# Altium PCB Routed Copy of PetTrackerPCB.PcbDoc
Units mm, origin at the board's own origin, x right, y up, seen from the top; angles counter-clockwise.
Board outline 116.71 x 58.42 mm, 4 copper layers (Top Layer, GND Plane, PWR Plane, Bottom Layer), stack 0.868 mm thick; 37 components, 44 nets, 216 pads, 87 vias.
Unrouted connection lines stored in the file: 60.
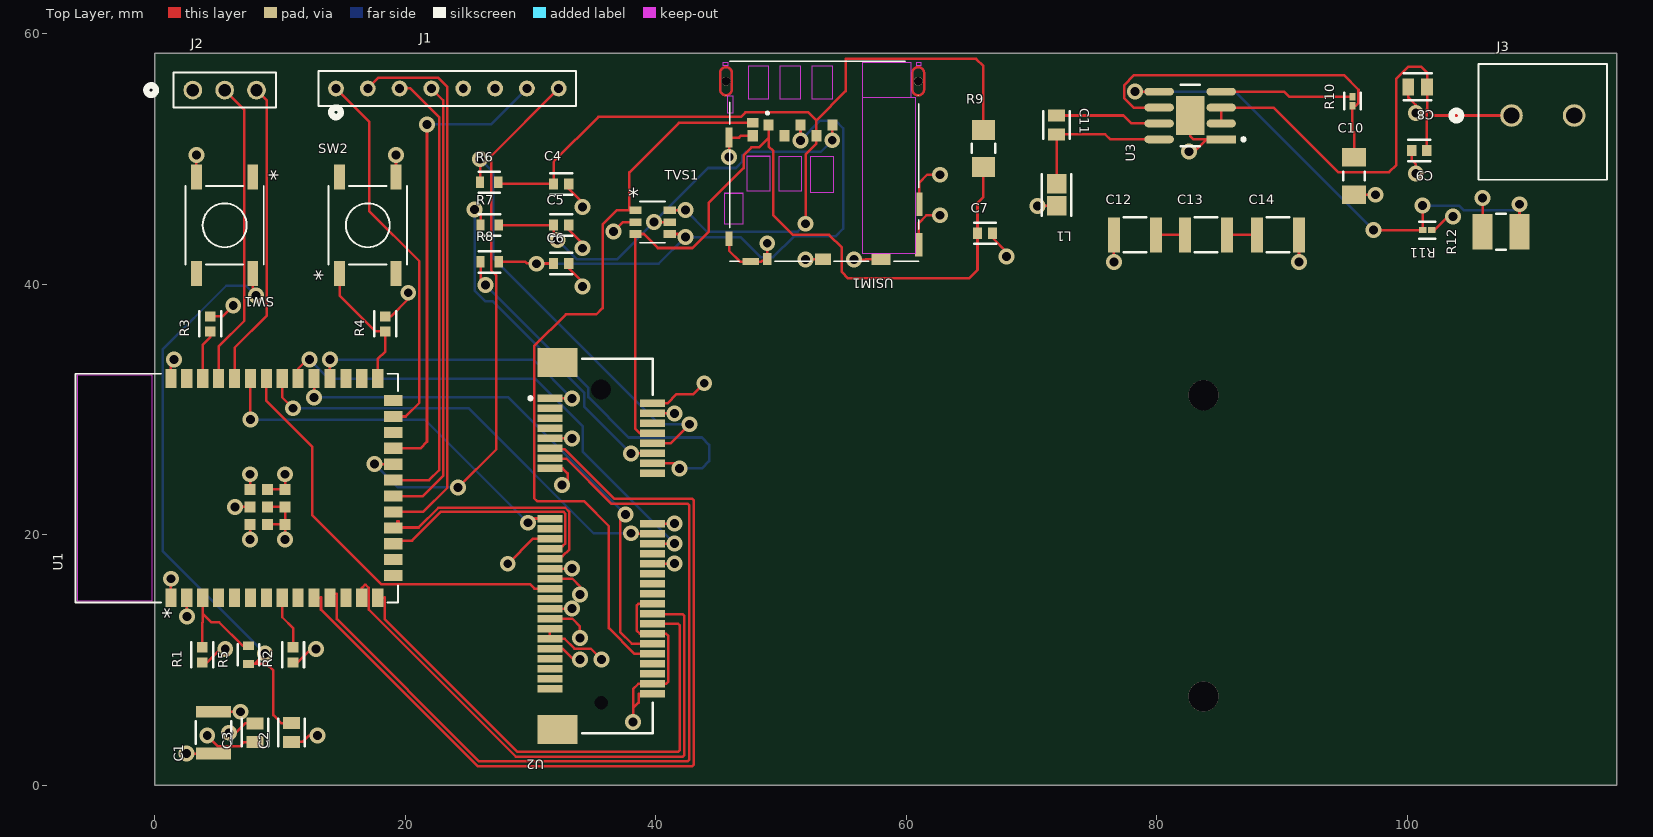
[diagram p0: Top Layer view]
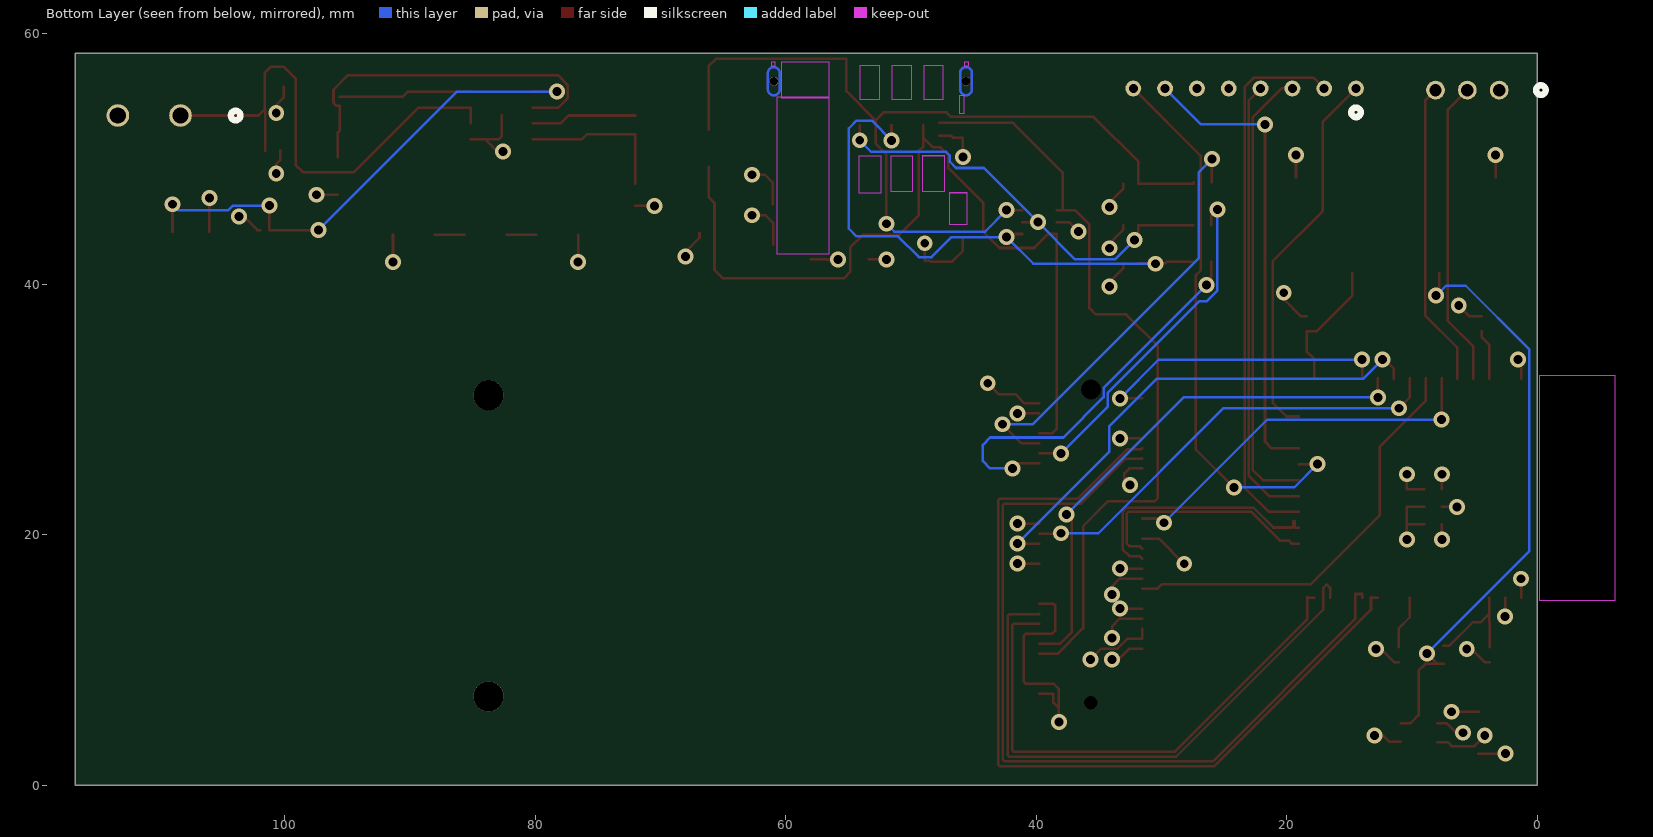
[diagram p1: Bottom Layer view, seen from below]
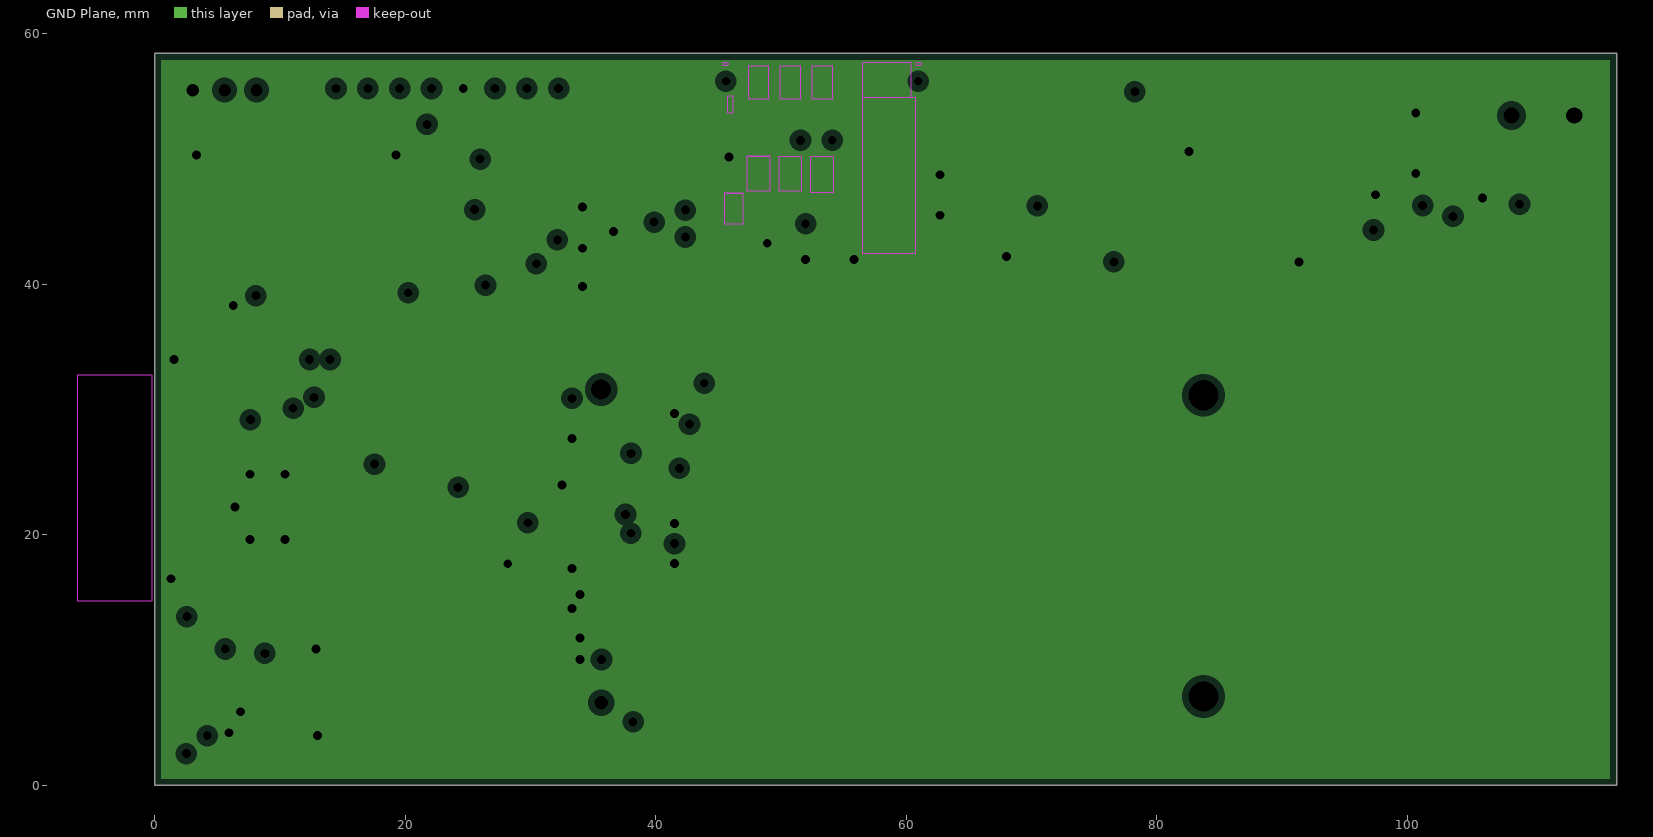
[diagram p2: GND Plane, clearances drawn from the general rule]
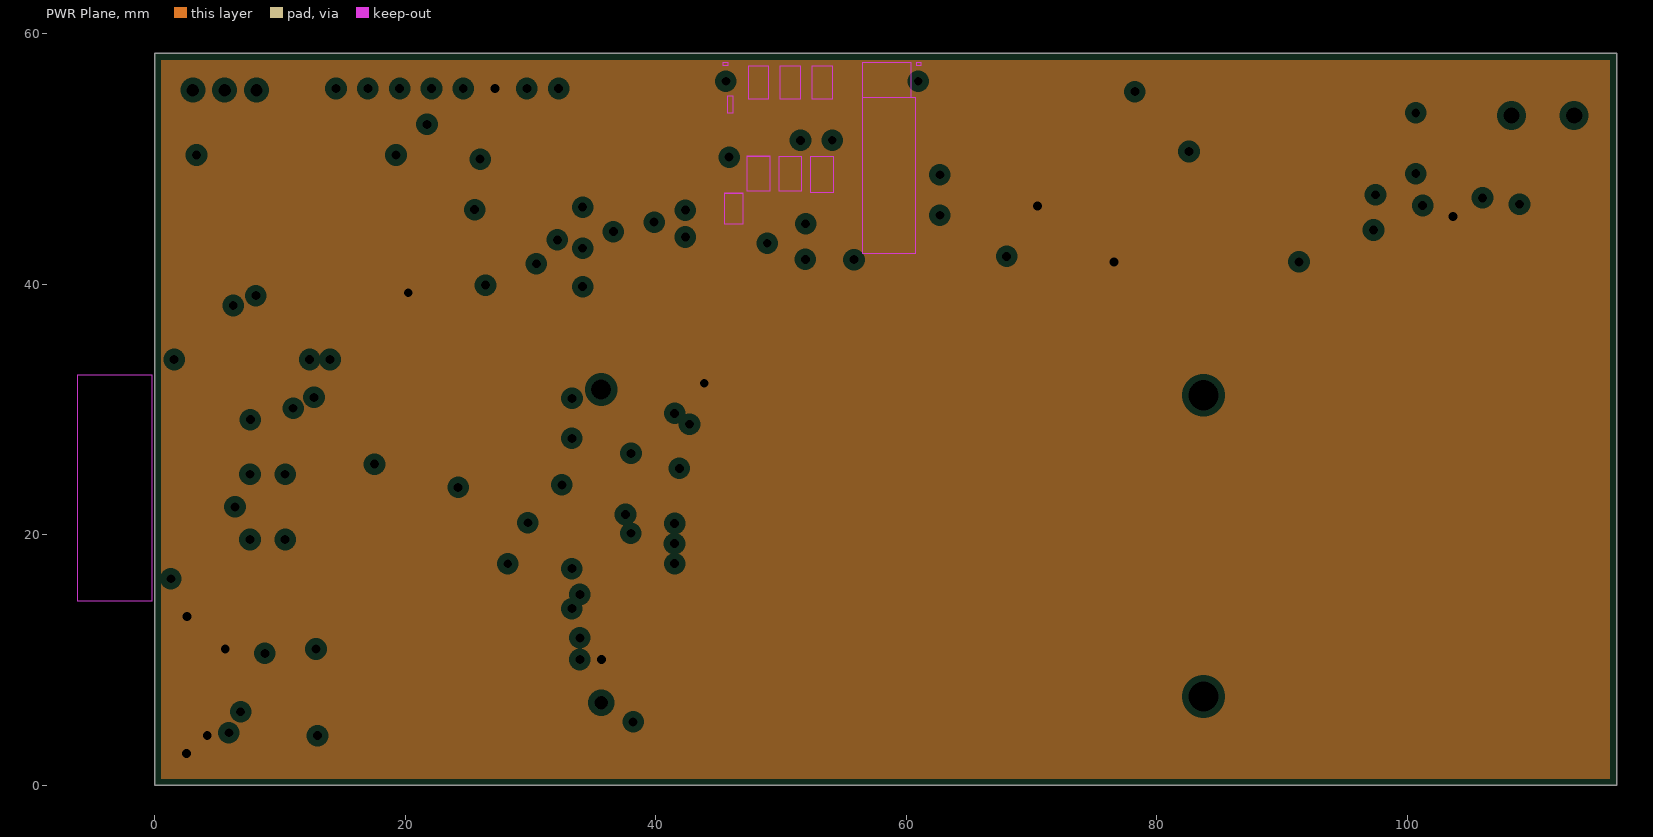
[diagram p3: PWR Plane, clearances drawn from the general rule]
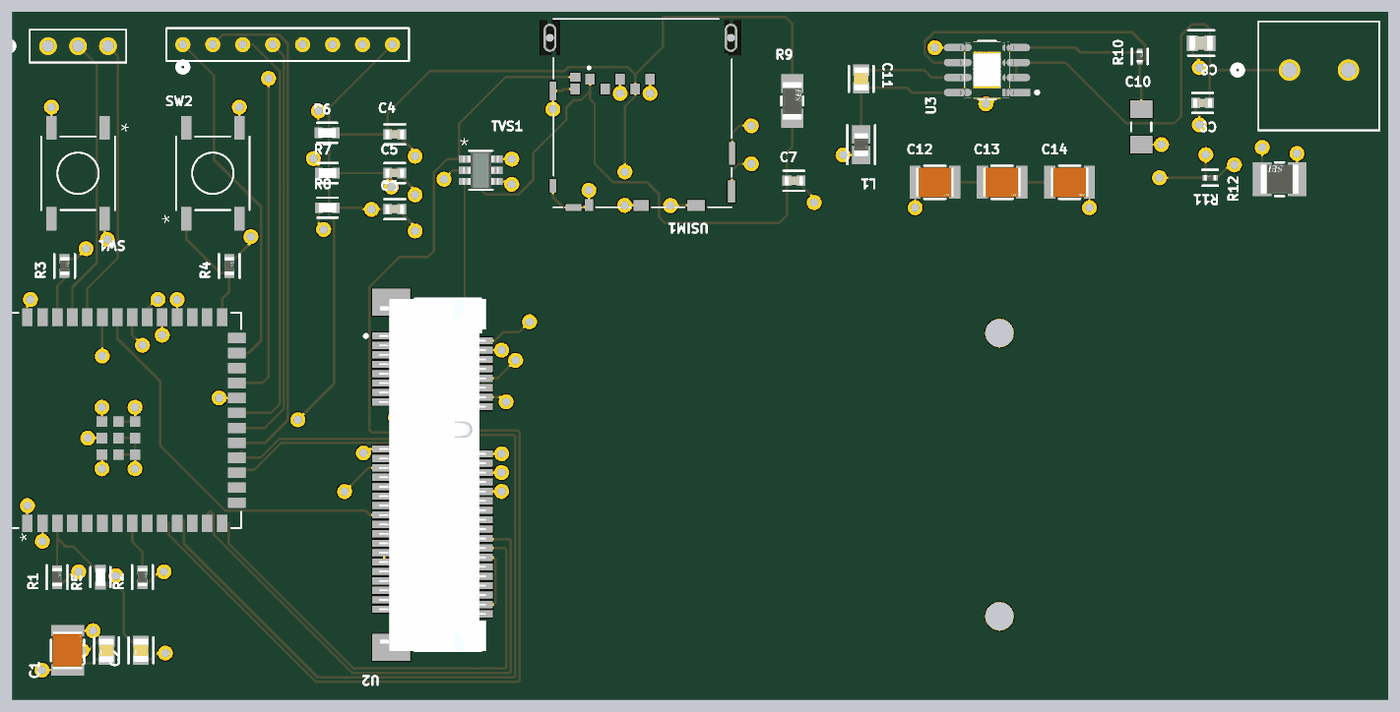
[diagram p4: 3D render of the assembled board from above, using the file's embedded part models]

## Layer stack, top to bottom
Top Solder: solder mask 0.0102, Solder Resist, Dk 3.5
Top Layer: signal copper 0.0356
Dielectric 4: core 0.1016, Core-009, Dk 4.5
Dielectric 2: core 0.1016, Core-009, Dk 4.5
GND Plane: plane copper 0.035, net GND
Dielectric 1: dielectric 0.32, FR-4, Dk 4.8
PWR Plane: plane copper 0.035, net +3V3
Dielectric 3: core 0.1016, Core-009, Dk 4.5
Dielectric 5: core 0.1016, Core-009, Dk 4.5
Bottom Layer: signal copper 0.0356
Bottom Solder: solder mask 0.0102, Solder Resist, Dk 3.5

## Board outline
0,0 116.713,0 116.713,58.42 0,58.42

## Design rules (kind name [scope] priority, off if disabled: settings)
Clearance [All] p1: gap=0.127 ignorepadtopadclearanceinfootprint=FALSE
Height [All] p1 off: minheight=0 maxheight=25.4 prefheight=12.7
PlaneClearance [All] p1: clearance=0.508
PlaneConnect [All] p1: planeconnectstyle=Relief reliefexpansion=0.508 reliefentries=4 reliefconductorwidth=0.254 reliefairgap=0.254
PolygonConnect [All] p1: connectstyle=Relief reliefconductorwidth=0.254 reliefentries=4 polygonreliefangle="90 Angle" airgapwidth=0.254
RoutingVias [All] p1: holewidth=0.711 width=1.27 viastyle="Through Hole" minholewidth=0.711 minwidth=1.27 maxholewidth=0.711 maxwidth=1.27
SolderMaskExpansion [All] p1: expansion=0.102 istentingtop=FALSE
Width [All] p1: maxlimit=25.4 minlimit=0.127 preferedwidth=0.203
27 further rules are at their usual default settings.

## Classes and differential pairs
component class PowerSupply: C8 C9 C10 C11 C12 C13 C14 CBOOT CHF CIN Cout CVCC J3 L L1 R10 R11 R12 RFBB RFBT U3
component class EC25: C4 C5 C6 C7 CRF1 CRF2 CRF3 CRF4 R6 R7 R8 R9 RDB1 RDB2 RDB3 RS1 TVS1 "TVS Array" U2 USIM1 "USIM Connector"
component class Dataflow: C1 C2 C3 "Camera Interface" J1 J2 R1 R2 R3 R4 R5 RDB RPU1 S2 SW1 SW2 U1 "USB Connector"

## Components (designator, comment, footprint, x,y, rotation, side; value= is the part's Value field where it differs from the comment)
C1 "C3225X7R1C226M250AC" FP-C3225-250-0_4-IPC_B 4.699,4.191 r90 top
C2 "C0805C104M5UACTU" FP-C0805C104M5UACTU-MFG 10.922,4.203 r90 top
C3 "C0805C104M5UACTU" FP-C0805C104M5UACTU-MFG 8.001,4.191 r90 top
C4 "C0603C104J5RACTU" FP-C0603C-CF-MFG 32.447,48.006 r0 top value="0.10 μF"
C5 "C0603C104J5RACTU" FP-C0603C-CF-MFG 32.447,44.72 r0 top value="0.10 μF"
C6 "C0603C104J5RACTU" FP-C0603C-CF-MFG 32.447,41.656 r0 top value="0.10 μF"
C7 "C0603C104J5RACTU" FP-C0603C-CF-MFG 66.294,44.069 r0 top value="0.10 μF"
C8 "C0805C106K8PACTU" FP-C0805C-DG-MFG 100.838,55.753 r180 top value=10uF
C9 "C0603C224K3RACTU" FP-C0603C-CF-MFG 100.965,50.673 r180 top value="0.22 μF"
C10 "C1206C105K3RACTU" CAPC3216X180X50ML20T25 95.758,48.641 r90 top
C11 "C0805C104M5UACTU" FP-C0805C104M5UACTU-MFG 72.009,52.717 r270 top
C12 "C3225X7R1C226M250AC" FP-C3225-250-0_4-IPC_B 78.256,43.942 r0 top
C13 "C3225X7R1C226M250AC" FP-C3225-250-0_4-IPC_B 83.947,43.942 r0 top
C14 "C3225X7R1C226M250AC" FP-C3225-250-0_4-IPC_B 89.686,43.942 r0 top
J1 "TS-108-T-A" CON8_1X8_TU_HTS_SAI 23.368,55.626 r0 top
J2 "PREC003SAAN-RC" CONN_PREC003SAAN-RC_SUL 3.048,55.499 r0 top
J3 "1935161" CONN_1935161_PXC 108.331,53.467 r0 top value=10uF
L1 "MLZ2012N6R8LT000" FP-MLZ2012-0_85-IPC_A 72.009,47.13 r270 top
R1 "RMCF0603JT10K0" FP-RMCF0603-IPC_C 3.81,10.414 r90 top
R2 "RMCF0603JT10K0" FP-RMCF0603-IPC_C 11.049,10.414 r90 top
R3 "RMCF0603JT10K0" FP-RMCF0603-IPC_C 4.445,36.83 r90 top
R4 "RMCF0603JT10K0" FP-RMCF0603-IPC_C 18.415,36.83 r90 top
R5 "RMCF0603ZT0R00" FP-RMCF0603-MFG 7.493,10.414 r90 top value=0mΩ
R6 "RMCF0603ZT0R00" FP-RMCF0603-MFG 26.707,48.133 r0 top value=0mΩ
R7 "RMCF0603ZT0R00" FP-RMCF0603-MFG 26.744,44.718 r0 top value=0mΩ
R8 "RMCF0603ZT0R00" FP-RMCF0603-MFG 26.744,41.783 r0 top value=0mΩ
R9 "RMCF1206JT15K0" FP-RMCF1206-IPC_A 66.167,50.848 r90 top
R10 "RMCF0402FT100K" FP-RMCF0402-IPC_C 95.631,54.61 r90 top
R11 "RMCF0402FT100K" FP-RMCF0402-IPC_C 101.6,44.323 r180 top
R12 "RMCF1210JT3K30" FP-RMCF1210-IPC_A 107.49,44.196 r180 top
SW1 "PTS645SL43SMTR92LFS" PTS645SL43SMTR92LFS_CNK 5.588,44.704 r270 top
SW2 "PTS645SL43SMTR92LFS" PTS645SL43SMTR92LFS_CNK 17.018,44.704 r90 top
TVS1 "AQRV05-4HTG" SOT23-6_LTF 39.751,44.958 r0 top
U1 "ESP32-S2-SOLO-N4R2" MOD41_ESP32-S2-SOLO_EXP 6.557,23.722 r90 top
U2 "2041119-1" TECO-2041119-1_3_V 35.651,19.092 r270 top
U3 "LMR33640ADDAR" FP-DDA0008J-IPC_A 82.677,53.467 r180 top
USIM1 "2174803-2" CONN_2174803-2 50.927,51.405 r180 top

## Footprints (in the part's own frame and the unit in brackets; to place one, negate y for a bottom-side part, rotate by r counter-clockwise, add the part's x,y. Pads: shape width x height; smd on the part's side, far side on the other; paste and mask are expansions set on the pad)
CAPC3216X180X50ML20T25 [mm] "Chip Capacitor, 2-Leads, Body 3.40x1.80mm, IPC Low Density"
  rect 1.5x1.9 smd: 1(-1.5,0) 2(1.5,0)
  silkscreen extent -0.35,-0.85 0.35,0.85, body extent -1.7,-0.9 1.7,0.9, height 1.8
CON8_1X8_TU_HTS_SAI [mil]
  round 50 / inner round 60 / far side round 50 hole 28 paste-99999 mask+0: 1(-350,0) 2(-250,0) 3(-150,0) 4(-50,0) 5(50,0) 6(150,0) 7(250,0) 8(350,0)
  silkscreen extent -405,-90 405,55
CONN_1935161_PXC [mil]
  round 71 / inner round 60 / far side round 71 hole 51 paste-99999 mask+0: 1(0,0) 2(196.85,0)
  silkscreen extent -188,-202 300,162
CONN_2174803-2 [mm]
  rect 0.8x0.9 smd: C1(1.905,-1.3) C2(-0.635,-1.3) C3(-3.175,-1.3) C5(3.175,-0.45) C6(0.635,-0.45) C7(-1.905,-0.45)
  rect 0.1x0.1 smd paste-1 mask+0: C8(5.315,-3.657) C17(-10.035,-3.657)
  rect 0.54x1.6 smd: C9(5.065,-0.3)
  rect 0.54x1.17 smd: C10(5.065,7.785)
  rect 1.33x0.55 smd: C11(3.33,9.605)
  rect 0.7x0.98 smd: C12(2.015,9.39)
  rect 1.3x0.91 smd: C13(-2.435,9.425)
  rect 1.53x0.91 smd: C14(-7.07,9.425)
  rect 0.6x1.9 smd: C15(-10.085,8.25)
  rect 0.5x1.9 smd: C16(-10.135,5.02)
  rect 0.9x0.75 smd: SW(3.175,-1.475)
  round 0.7 hole 0.7 unplated: ""(-10.035,-4.8) ""(5.315,-4.8)
  Top Layer region: 126 vertices and 1 holes, not listed, extent 4.765,-6 5.865,-3.6
  Top Layer region: 124 vertices and 1 holes, not listed, extent -10.585,-6 -9.485,-3.6
  Bottom Layer region: 126 vertices and 1 holes, not listed, extent 4.765,-6 5.865,-3.6
  Bottom Layer region: 124 vertices and 1 holes, not listed, extent -10.585,-6 -9.485,-3.6
  Keep-Out Layer region: -5.624,-3.502 -9.806,-3.502 -9.806,8.97 -5.624,8.97
  Keep-Out Layer region: -5.624,-6.326 -9.458,-6.326 -9.458,-3.5 -5.624,-3.5
  Keep-Out Layer region: -1.565,-6.021 -3.155,-6.021 -3.155,-3.35 -1.565,-3.35
  Keep-Out Layer region: 0.975,-6.024 -0.615,-6.024 -0.615,-3.35 0.975,-3.35
  Keep-Out Layer region: 3.515,-6.031 1.928,-6.031 1.928,-3.35 3.515,-3.35
  Keep-Out Layer region: 5.515,-6.332 5.175,-6.332 5.175,-6.02 5.515,-6.02
  Keep-Out Layer region: 5.165,-3.65 4.765,-3.65 4.765,-2.25 5.165,-2.25
  Keep-Out Layer region: -1.465,1.172 -3.261,1.172 -3.261,4.12 -1.465,4.12
  Keep-Out Layer region: 1.075,1.171 -0.716,1.171 -0.716,4 1.075,4
  Keep-Out Layer region: 3.615,1.172 1.828,1.172 1.828,4 3.615,4
  Keep-Out Layer region: 5.42,4.127 3.977,4.127 3.977,6.63 5.42,6.63
  Keep-Out Layer region: -9.9,-6.323 -10.24,-6.323 -10.24,-6.02 -9.9,-6.02
  Keep-Out Layer region: -5.624,-3.505 -9.815,-3.505 -9.815,8.97 -5.624,8.97
  Keep-Out Layer region: -5.624,-6.322 -9.452,-6.322 -9.452,-3.5 -5.624,-3.5
  Keep-Out Layer region: -1.565,-6.027 -3.159,-6.027 -3.159,-3.35 -1.565,-3.35
  Keep-Out Layer region: 0.975,-6.023 -0.615,-6.023 -0.615,-3.35 0.975,-3.35
  Keep-Out Layer region: 3.515,-6.021 1.925,-6.021 1.925,-3.35 3.515,-3.35
  Keep-Out Layer region: 5.515,-6.326 5.17,-6.326 5.17,-6.02 5.515,-6.02
  Keep-Out Layer region: 5.165,-3.653 4.768,-3.653 4.768,-2.25 5.165,-2.25
  Keep-Out Layer region: -1.465,1.172 -3.261,1.172 -3.261,4.12 -1.465,4.12
  Keep-Out Layer region: 1.075,1.171 -0.716,1.171 -0.716,4 1.075,4
  Keep-Out Layer region: 3.615,1.171 1.826,1.171 1.826,4 3.615,4
  Keep-Out Layer region: 5.42,4.123 3.973,4.123 3.973,6.63 5.42,6.63
  Keep-Out Layer region: -9.9,-6.332 -10.255,-6.332 -10.255,-6.02 -9.9,-6.02
  Keep-Out Layer region: -5.624,-3.506 -9.818,-3.506 -9.818,8.97 -5.624,8.97
  Keep-Out Layer region: -5.624,-6.322 -9.454,-6.322 -9.454,-3.5 -5.624,-3.5
  Keep-Out Layer region: -1.565,-6.024 -3.157,-6.024 -3.157,-3.35 -1.565,-3.35
  Keep-Out Layer region: 0.975,-6.03 -0.616,-6.03 -0.616,-3.35 0.975,-3.35
  Keep-Out Layer region: 3.515,-6.028 1.927,-6.028 1.927,-3.35 3.515,-3.35
  Keep-Out Layer region: 5.515,-6.332 5.175,-6.332 5.175,-6.02 5.515,-6.02
  Keep-Out Layer region: 5.165,-3.653 4.769,-3.653 4.769,-2.25 5.165,-2.25
  Keep-Out Layer region: -1.465,1.172 -3.261,1.172 -3.261,4.12 -1.465,4.12
  Keep-Out Layer region: 1.075,1.171 -0.715,1.171 -0.715,4 1.075,4
  Keep-Out Layer region: 3.615,1.17 1.825,1.17 1.825,4 3.615,4
  Keep-Out Layer region: 5.42,4.121 3.971,4.121 3.971,6.63 5.42,6.63
  Keep-Out Layer region: -9.9,-6.332 -10.255,-6.332 -10.255,-6.02 -9.9,-6.02
  silkscreen extent -10.09,-6.4 5.01,9.58
CONN_PREC003SAAN-RC_SUL [mil]
  round 59 / inner round 60 / far side round 59 hole 39 paste-99999 mask+0: 1(0,0) 2(100,0) 3(200,0)
  silkscreen extent -146,-55 261,55
FP-C0603C-CF-MFG [mm]
  rect 0.75x0.9 smd paste+0 mask+0: 1(-0.6,0) 2(0.6,0)
  silkscreen extent -0.88,-0.85 0.88,0.85, body extent -1.2,-0.6 1.2,0.6, height 0.25
FP-C0805C104M5UACTU-MFG [mm]
  rect 0.95x1.35 smd paste+0 mask+0: 1(-0.75,0) 2(0.75,0)
  silkscreen extent -1.1,-1.05 1.1,1.05, body extent -1.4,-0.85 1.4,0.85, height 0.25
FP-C0805C-DG-MFG [mm]
  rect 0.95x1.35 smd paste+0 mask+0: 1(-0.75,0) 2(0.75,0)
  silkscreen extent -1.11,-1.08 1.1,1.07, body extent -1.4,-0.85 1.4,0.85, height 0.25
FP-C3225-250-0_4-IPC_B [mm]
  rect 0.953x2.804 smd paste+0 mask+0: 1(-1.675,0) 2(1.675,0)
  silkscreen extent -0.9,-1.4 0.9,1.4, body extent -2.4,-1.65 2.4,1.65, height 0.25
FP-DDA0008J-IPC_A [mm]
  rect 2.353x0.622 smd paste+0 mask+0: 1(-2.477,1.905)
  rrect100% 2.353x0.622 smd paste+0 mask+0: 2(-2.477,0.635) 3(-2.477,-0.635) 4(-2.477,-1.905) 5(2.477,-1.905) 6(2.477,-0.635) 7(2.477,0.635) 8(2.477,1.905)
  rect 2.3x3.1 smd paste-1000 mask+0: 9(0,0)
  silkscreen extent -4.38,-2.45 0.75,2.45, body extent -4.15,-2.95 4.15,2.95, height 0.25
FP-MLZ2012-0_85-IPC_A [mm]
  rect 1.554x1.556 smd paste+0 mask+0: 1(-0.876,0) 2(0.876,0)
  silkscreen extent -1.65,-1.18 1.65,1.18, body extent -2.15,-1.28 2.15,1.28, height 0.25
FP-RMCF0402-IPC_C [mm]
  rect 0.581x0.472 smd paste+0 mask+0: 1(-0.366,0) 2(0.366,0)
  silkscreen extent -0.66,-0.67 0.66,0.67, body extent -0.76,-0.38 0.76,0.38, height 0.25
FP-RMCF0603-IPC_C [mm]
  rect 0.806x0.858 smd paste+0 mask+0: 1(-0.601,0) 2(0.601,0)
  silkscreen extent -1,-0.87 1,0.87, body extent -1.1,-0.58 1.1,0.58, height 0.25
FP-RMCF0603-MFG [mm]
  rect 0.65x0.9 smd paste+0 mask+0: 1(-0.725,0) 2(0.725,0)
  silkscreen extent -0.85,-0.85 0.85,0.85, body extent -1.15,-0.58 1.15,0.58, height 0.25
FP-RMCF1206-IPC_A [mm]
  rect 1.604x1.858 smd paste+0 mask+0: 1(-1.476,0) 2(1.476,0)
  silkscreen extent -0.37,-0.93 0.37,0.93, body extent -2.78,-1.43 2.78,1.43, height 0.25
FP-RMCF1210-IPC_A [mm]
  rect 1.604x2.855 smd paste+0 mask+0: 1(-1.476,0) 2(1.476,0)
  silkscreen extent -0.37,-1.43 0.37,1.43, body extent -2.78,-1.93 2.78,1.93, height 0.25
MOD41_ESP32-S2-SOLO_EXP [mil]
  rect 59x35 smd paste+0 mask+0: 1(-344.49,207.09) 2(-344.49,157.09) 3(-344.49,107.09) 4(-344.49,57.09) 5(-344.49,7.09) 6(-344.49,-42.91) 7(-344.49,-92.91) 8(-344.49,-142.91) 9(-344.49,-192.91) 10(-344.49,-242.91) 11(-344.49,-292.91) 12(-344.49,-342.91) 13(-344.49,-392.91) 14(-344.49,-442.91) 27(344.49,-442.91) 28(344.49,-392.91) 29(344.49,-342.91) 30(344.49,-292.91) 31(344.49,-242.91) 32(344.49,-192.91) 33(344.49,-142.91) 34(344.49,-92.91) 35(344.49,-42.91) 36(344.49,7.09) 37(344.49,57.09) 38(344.49,107.09) 39(344.49,157.09) 40(344.49,207.09)
  rect 35x59 smd paste+0 mask+0: 15(-275,-492.13) 16(-225,-492.13) 17(-175,-492.13) 18(-125,-492.13) 19(-75,-492.13) 20(-25,-492.13) 21(25,-492.13) 22(75,-492.13) 23(125,-492.13) 24(175,-492.13) 25(225,-492.13) 26(275,-492.13)
  rect 35x35 smd paste+0 mask+0: 41(-59.05,-96.85) 42(-114.17,-41.73) 43(-114.17,-96.85) 44(-114.17,-151.97) 45(-59.05,-151.97) 46(-3.94,-151.97) 47(-3.94,-96.85) 48(-3.94,-41.73) 49(-59.05,-41.73)
  Keep-Out Layer region: 354.5,502 -354.5,502 -354.5,266 354.5,266
  silkscreen extent -359,-507 360,507
PTS645SL43SMTR92LFS_CNK [mil]
  rect 79x34 smd paste+0 mask+0: 1(-151.5,88.58) 2(151.5,88.58) 3(-151.5,-88.58) 4(151.5,-88.58)
  silkscreen extent -123,-123 123,123
SOT23-6_LTF [mil]
  rect 38.5x24 smd paste+0 mask+0: 1(-53.75,37.4) 2(-53.75,0) 3(-53.75,-37.4) 4(53.75,-37.4) 5(53.75,0) 6(53.75,37.4)
  silkscreen extent -40,-65 40,65, body extent -59,-60 59,60, height 57
TECO-2041119-1_3_V [mm] "Connector, 52-Leads, Body 29.9x8.2mm, Pitch 0.4mm"
  rect 0.6x2 smd: 1(-11.8,-4.1) 2(-11.4,4.1) 3(-11,-4.1) 4(-10.6,4.1) 5(-10.2,-4.1) 6(-9.8,4.1) 7(-9.4,-4.1) 8(-9,4.1) 9(-8.6,-4.1) 10(-8.2,4.1) 11(-7.8,-4.1) 12(-7.4,4.1) 13(-7,-4.1) 14(-6.6,4.1) 15(-6.2,-4.1) 16(-5.8,4.1) 17(-2.2,-4.1) 18(-1.8,4.1) 19(-1.4,-4.1) 20(-1,4.1) 21(-0.6,-4.1) 22(-0.2,4.1) 23(0.2,-4.1) 24(0.6,4.1) 25(1,-4.1) 26(1.4,4.1) 27(1.8,-4.1) 28(2.2,4.1) 29(2.6,-4.1) 30(3,4.1) 31(3.4,-4.1) 32(3.8,4.1) 33(4.2,-4.1) 34(4.6,4.1) 35(5,-4.1) 36(5.4,4.1) 37(5.8,-4.1) 38(6.2,4.1) 39(6.6,-4.1) 40(7,4.1) 41(7.4,-4.1) 42(7.8,4.1) 43(8.2,-4.1) 44(8.6,4.1) 45(9,-4.1) 46(9.4,4.1) 47(9.8,-4.1) 48(10.2,4.1) 49(10.6,-4.1) 50(11,4.1) 51(11.4,-4.1) 52(11.8,4.1)
  round 1.3 hole 1.6 unplated: MH1(-12.5,0)
  round 0.9 hole 1.1 unplated: MH2(12.5,0)
  rect 2.3x3.2 smd: MP1(-14.65,-3.5) MP2(14.65,-3.5)
  silkscreen extent -14.95,-5.77 14.95,4.1, body extent -14.95,-4.54 14.95,4.55, height 4

## Part data
C1 C12 C13 C14: library part CMP-2000-06052-2, "Multilayer Ceramic Capacitors 22uF ±20% 16V X7R SMD 1210", Capacitance=22uF, Case Code (Imperial)=1210, Case Code (Metric)=3225, Dielectric=X7R, Dielectric Material=Ceramic, Max Operating Temperature=125°C, Min Operating Temperature=-55°C, Package Quantity=1, Tolerance=20%, Voltage Rating=16V, Case/Package=1210, Construction=Flat, Depth=2.5mm, Height=2.5mm, Lead Free="Lead Free", Length=3.2mm, Mount="Surface Mount", Number of Pins=2, Packaging="Tape and Reel", Radiation Hardening=No, REACH SVHC="No SVHC", Resistor Type=Ceramic, RoHS Compliant=Yes, Series=C, Termination=SMD/SMT, Thickness=0.11inch, Voltage Rating (DC)=16V, Weight=0.000564oz, Width=0.098inch
C2 C3 C11: library part CMP-2007-03742-2, "CAP CER 0.1UF 50V Z5U 0805", Capacitance=100nF, Case Code (Imperial)=0805, Case Code (Metric)=2012, Dielectric=Z5U, Dielectric Material=Ceramic, Max Operating Temperature=85°C, Min Operating Temperature=10°C, Package Quantity=1, Tolerance=20%, Voltage=50V, Case/Package=0805, Construction=Flat, Contact Plating=Tin, Depth=1.25mm, Dissipation Factor=4%, Height=0.78mm, Lead Free="Lead Free", Lead Pitch=0.75mm, Length=2mm, Mount="Surface Mount", Number of Pins=2, Packaging="Tape and Reel", Radiation Hardening=No, REACH SVHC="No SVHC", RoHS Compliant=Yes, Series=C, Termination=SMD/SMT, Thickness=0.035inch, Voltage Rating=50V, Voltage Rating (DC)=50V, Width=1.2mm
C4 C5 C6 C7: library part CMP-2006-03056-2, "CAP CER 0.1UF 50V 5% X7R 0603", Capacitance="0.10 μF", Manufacturer=KEMET, Package=C0603C-CF, Temperature="-55°C to +125°C", Temperature Characteristic=X7R, Temperature Coefficient=30ppm/°C, Temperature Range High=+125°C, Temperature Range Low=-55°C, Tolerance=0.05, Voltage Rating="50 V", Automotive=Yes, Automotive Grade="Grade 1", Category=Cap, ComponentLink2Description=Datasheet, ComponentLink2URL=https://api.kemet.com/component-edge/download/datasheet/C0603C100J5GACAUTO.pdf, Device Class L1="Passive Components", Device Class L2=Capacitors, Device Class L3="Ceramic Capacitors", Digikey Description="CAP CER 0.1UF 50V 5% X7R 0603", Height=0.87mm, Lead Free=Yes, Manufacturer Part Number=C0603C104J5RACTU, Material=Ceramic, Mouser Description="Multilayer Ceramic Capacitors MLCC - SMD/SMT 50volts 0.1uF X7R 5%", Octopart=https://octopart.com/c0603c104j5ractu-kemet-10440638, RoHS=TRUE
C8: library part CMP-2007-03243-2, "CAP CER 10UF 10V X5R 0805", 3DS Part Number=220-00001, Capacitance=10uF, Manufacturer=Kemet, Package=C0805C-DG, Temperature="-55°C to +85°C", Temperature Characteristic=X5R, Temperature Coefficient=15%, Temperature Range High=+85°C, Temperature Range Low=-55°C, Tolerance=10%, Voltage=10V, Automotive=No, Category=Cap, ComponentLink2Description=Datasheet, ComponentLink2URL=https://content.kemet.com/datasheets/KEM_C1006_X5R_SMD.pdf, Device Class L1="Passive Components", Device Class L2=Capacitors, Device Class L3="Ceramic Capacitors", Digikey Description="CAP CER 10UF 10V X5R 0805", Height=1.4mm, Ipc Land Pattern Name=CAPC200125X125, Lead Free=Yes, Manufacturer Part Number=C0805C106K8PACTU, Material=Ceramic, Mouser Description="CAP CER 10UF 10V X5R 0805", Octopart=https://octopart.com/c0805c106k8pactu-kemet-98697, RoHS=TRUE, Voltage Rating=10V
C9: library part CMP-2006-03146-2, "CAP CER 0.22UF 25V 10% X7R 0603", Capacitance="0.22 μF", Manufacturer=KEMET, Package=C0603C-CF, Temperature="-55°C to +125°C", Temperature Characteristic=X7R, Temperature Coefficient=30ppm/°C, Temperature Range High=+125°C, Temperature Range Low=-55°C, Tolerance=0.1, Voltage Rating="25 V", Automotive=Yes, Automotive Grade="Grade 1", Category=Cap, ComponentLink2Description=Datasheet, ComponentLink2URL=https://api.kemet.com/component-edge/download/datasheet/C0603C100J5GACAUTO.pdf, Device Class L1="Passive Components", Device Class L2=Capacitors, Device Class L3="Ceramic Capacitors", Digikey Description="CAP CER 0.22UF 25V 10% X7R 0603", Height=0.87mm, Lead Free=Yes, Manufacturer Part Number=C0603C224K3RACTU, Material=Ceramic, Mouser Description="Multilayer Ceramic Capacitors MLCC - SMD/SMT 25volts 0.22uF X7R 10%", Octopart=https://octopart.com/c0603c224k3ractu-kemet-129141, RoHS=TRUE
C10: library part CMP-2000-04991-1, "Chip Capacitor, 1 uF, +/- 10%, 25 V, -55 to 125 degC, 1206 (3216 Metric), RoHS, Tape and Reel", Capacitance=1uF, Capacitance - nF=1000nF, Case Code - in=1206, Case Code - mm=3216, Case Height=1.6mm, Case Length=3.2mm, Dielectric=X7R, Manufacturer=Kemet, Maximum Operating Temperature=+125C, Minimum Operating Temperature=-55C, Operating Temperature Range=-55Cto+125C, Package / Case=1206(3216metric), Package Description="2-Pin Surface Mount Device, Body 3.2 x 1.6 mm", Temperature Coefficient / Code=+/-15%, Tolerance=10%, Voltage Rating=25V, Brand=Kemet, Case Width=1.6mm, Class=Class1, Datasheet URL=https://ciiva.com/datasheet-click-18194173?src=ciiva&sig=6daff8c4, Datasheet Version=Jul-14, Dimensions=1.6mmWx3.2mmLx1.6mmH, Factory Pack Quantity=2000, Manufacturer URL=http://www.kemet.com/, Package Reference=1206, Packaging=Reel, Product=GeneralTypeMLCCs, Product Category=MultilayerCeramicCapacitorsMLCC-SMD/SMT, RoHS=Details, Series=C1206C, Termination Style=SMD/SMT, Type=SMDMLCCX7R6.3-250VDCCommericalGrade, Voltage Rating DC=25V
J1: "No Description Available", Mfr_Name="Samtec Inc", RefDes=RefDes, Type=Type
J2: "No Description Available", Mfr_Name=Sullins, Digi-Key_Part_Number_1=S1012EC-03-ND, RefDes=RefDes, Type=Type
J3: "Ceramic Capacitor, Multilayer, Ceramic, 16V, 10% +Tol, 10% -Tol, X5R, 15% TC, 10uF, Surface Mount, 0805", Capacitor Type=Ceramic, Case/Package=0805, Manufacturer=Samsung, Manufacturer Part Number=CL21A106KOQNNNE, Max Operating Temperature=85°C, Mfr_Name="Phoenix Contact", Min Operating Temperature=-55°C, Package Shape=Rectangular, Package Style=SMTMeter, Rated DC Voltage (URdc)=16V, Supplier Part Number=1276-1096-1-ND, Temperature Characteristics Code=X5R, Tolerance  (fill in as +-)=10%, Category="Ceramic Capacitors", ComponentLink1Description=https://datasheet.ciiva.com:443/pdfs/VipMasterIC/IC/SEMS/SEMS-S-A0008520559/SEMS-S-A0008520510-1.pdf?src-supplier=IHS+Markit, ComponentLink1URL=https://datasheet.ciiva.com:443/pdfs/VipMasterIC/IC/SEMS/SEMS-S-A0008520559/SEMS-S-A0008520510-1.pdf?src-supplier=IHS+Markit, ComponentLink2Description=https://datasheet.ciiva.com/15216/getdatasheetpartid-358435-15216234.pdf?src-supplier=Verical, ComponentLink2URL=https://datasheet.ciiva.com/15216/getdatasheetpartid-358435-15216234.pdf?src-supplier=Verical, ComponentLink3Description=https://datasheet.ciiva.com/25798/cl21a106koqnnne-25798133.pdf?src-supplier=Digikey, ComponentLink3URL=https://datasheet.ciiva.com/25798/cl21a106koqnnne-25798133.pdf?src-supplier=Digikey, Dielectric Material=Ceramic, Height=1.4mm, JESD-609 Code=e3, Length=2mm, Mounting Technology="Surface Mount", Multilayer=Yes, Packaging="Tape and Reel", Pins=2, Pricing="1=0.1, 10=0.07, 50=0.0404, 100=0.0313, 500=0.02354, 1000=0.0185 (USD)", Reach SVHC Compliant=Yes, RefDes=RefDes, RoHS=Yes, RoHS Compliant=Yes, Stock=3573508, Supplier=Digikey, Terminal Finish=Nickel, Termination=Wraparound, Tolerance (fill in as +-)=10%, Type=Type, Width=1.25mm
L1: library part CMP-08253-000092-1, "Shielded Multilayer Inductor 6.8uH ±20% 550mA 325mΩ SMD 0805", Case Code (Imperial)=0805, Case Code (Metric)=2012, Current Rating=550mA, DC Resistance (DCR)=250mR, Inductance=6.8uH, Max Operating Temperature=125°C, Min Operating Temperature=-55°C, Package Quantity=1, Saturation Current=110mA, Self Resonant Frequency=60MHz, Test Frequency=2MHz, Tolerance=20%, Case/Package=0805, Core Material=Ferrite, Height - Seated (Max)=0.057inch, Lead Free="Lead Free", Length=0.079inch, Mount="Surface Mount", Packaging="Tape and Reel", RoHS Compliant=Yes, Shielding=Shielded, Width=0.049inch
R1 R2 R3 R4: library part CMP-26527-002098-1, "10kΩ ±5% 0.1W 0603 Thick Film Chip Resistor AEC-Q200 compliant", Case Code (Imperial)=0603, Case Code (Metric)=1608, Max Operating Temperature=155°C, Max Power Dissipation=100mW, Min Operating Temperature=-55°C, Resistance=10kR, Resistor Type="Thick Film", Temperature Coefficient=100ppm/°C, Tolerance=5%, Case/Package=0603, Construction=Rectangular, Contact Plating=Tin, Depth=0.8mm, Features="Automotive AEC-Q200", Height=0.022inch, Lead Free="Lead Free", Length=1.55mm, Military Standard=Not, Mount="Surface Mount", Number of Terminations=2, Packaging="Tape and Reel", Power Rating=100mW, Radiation Hardening=No, Series=RMCF, Size Code=0603, Width=0.031inch
R5 R6 R7 R8: library part CMP-26527-000011-1, "RES 0 OHM JUMPER 1/10W 0603", Manufacturer=Stackpole, Package=RMCF0603, Power Rating=0.1W, Resistance=0mΩ, Temperature="-55°C to +155°C", Temperature Range High=+155°C, Temperature Range Low=-55°C, Voltage Rating=75V, Automotive=Yes, Automotive Grade="Grade 0", Category=Res, ComponentLink2Description=Datasheet, ComponentLink2URL=https://www.seielect.com/catalog/sei-rmcf_rmcp.pdf, Composition="Thick Film", Device Class L1="Passive Components", Device Class L2=Resistors, Device Class L3="Chip SMD Resistors", Digikey Description="RES 0 OHM JUMPER 1/10W 0603", Height=0.55mm, Ipc Land Pattern Name=RESC15580X45, Lead Free=Yes, Manufacturer Part Number=RMCF0603ZT0R00, Octopart=https://octopart.com/rmcf0603zt0r00-stackpole+electronics-19213618, RoHS=TRUE, Series=RMCF
R9: library part CMP-26527-001400-1, "15kΩ ±5% 0.25W 1206 Thick Film Chip Resistor AEC-Q200 compliant", Case Code (Imperial)=1206, Case Code (Metric)=3216, Max Operating Temperature=155°C, Max Power Dissipation=250mW, Min Operating Temperature=-55°C, Resistance=15kR, Resistor Type="Thick Film", Temperature Coefficient=200ppm/°C, Tolerance=5%, Case/Package=1206, Construction=Rectangular, Contact Plating=Tin, Depth=1.6mm, Features="Automotive AEC-Q200", Height=0.028inch, Lead Free="Lead Free", Length=0.126inch, Military Standard=Not, Mount="Surface Mount", Number of Terminations=2, Packaging="Tape and Reel", Power Rating=250mW, Radiation Hardening=No, RoHS Compliant=Yes, Series=RMCF, Size Code=1206, Width=0.063inch
R10 R11: library part CMP-2000-06984-2, "100kΩ ±1% 0.063W 0402 Thick Film Chip Resistor AEC-Q200 compliant", Case Code (Imperial)=0402, Case Code (Metric)=1005, Max Operating Temperature=155°C, Max Power Dissipation=63mW, Min Operating Temperature=-55°C, Power Rating=62.5mW, Resistance=100kR, Resistor Type="Thick Film", Temperature Coefficient=100ppm/°C, Tolerance=1%, Case/Package=0402, Construction=Rectangular, Contact Plating=Tin, Depth=0.5mm, Features="Automotive AEC-Q200", Height=0.016inch, Lead Free="Lead Free", Length=1mm, Military Standard=Not, Mount="Surface Mount", Number of Terminations=2, Packaging="Tape and Reel", Radiation Hardening=No, RoHS Compliant=Yes, Series=RMCF, Size Code=0402, Width=0.02inch
R12: library part CMP-26527-001928-1, "3.3kΩ ±5% 0.5W 1210 Thick Film Chip Resistor AEC-Q200 compliant", Case/Package=1210, Max Operating Temperature=155°C, Max Power Dissipation=333mW, Min Operating Temperature=-55°C, Resistance=3.3kR, Resistor Type="Thick Film", Temperature Coefficient=200ppm/°C, Tolerance=5%, Contact Plating=Tin, Features="Automotive AEC-Q200", Height=0.028inch, Lead Free="Lead Free", Length=0.126inch, Mount="Surface Mount", Number of Terminations=2, Packaging="Tape and Reel", Radiation Hardening=No, RoHS Compliant=Yes, Series=RMCF, Width=0.098inch
SW1 SW2: "No Description Available", Mfr_Name="C&K Components", RefDes=RefDes, Type=Type
TVS1: "No Description Available", Mfr_Name="Littelfuse Inc", RefDes=RefDes, Type=Type
U1: "No Description Available", Mfr_Name="Espressif Systems", RefDes=RefDes, Type=RF
U2: library part CMP-2011-00000-2, "mSATA & PCI Express Mini Card Connector, Pitch 0.4 mm, 52 Position, Height 4 mm, RoHS, Tape and Reel", Case\Package=SMD, Housing Colour=Black, Manufacturer="TE Connectivity", Package Description="mSATA & PCI Express Mini Card Connector, Pitch 0.4 mm, 52 Position, Height 4 mm", Package Reference=2041119-1_3, Contact Material=Copper, Contact Plating=Gold, Contacts=52, Datasheet URL=http://www.te.com/commerce/DocumentDelivery/DDEController?Action=showdoc&DocId=Customer+Drawing%7F2041119%7FD%7Fpdf%7FEnglish%7FENG_CD_2041119_D.pdf%7F2041119-1, Datasheet Version=06/2016, ELV=Compliant, Height=4mm, Housing Material=Polymer, Length=29.9mm, Manufacturer URL=http://www.te.com/, Mount=SurfaceMount, Mounting Technology=SurfaceMount, Orientation=RightAngle, Packaging=TapeandReel, Poles=52, Radiation Hardening=No, RoHSCompliant=true, Rows=2, Termination=Solder, Width=9.02mm
U3: library part CMP-04918-000399-1, "36V 4A 400KHZ REGULATOR"
USIM1: "CONNECTOR, SIM SOCKET, 6POS, 2.54MM; Connector Type:SIM Socket; Series:2174803;", Package=None, Voltage_Rating="10 VAC", Availability=Unavailable, Centerline_Pitch="2.54 mm[.1 in]", EU_RoHS_Compliance=Compliant, MF="TE Connectivity", MP=2174803-2, Number_of_Positions=6, Price=None, Product_Type=Connector, SnapEDA_Link=https://www.snapeda.com/parts/2174803-2/TE%20Connectivity%20AMP%20Connectors/view-part/47676/?ref=snap, TE_purchase_URL=https://www.te.com/usa-en/product-2174803-2.html?te_bu=Cor&te_type=disp&te_campaign=seda_glo_cor-seda-global-disp-prtnr-fy19-seda-model-bom-cta_sma-317_1&elqCampaignId=32493

## Free pads (board coordinates)
  round 2.4 hole 2.4: 2(83.737,31.136) 3(83.737,7.091)

## Via types
v1: diameter 1.27, hole 0.711, Top Layer to Bottom Layer, 87 vias

## Nets (pads, with @x,y where several pads share a name; then routed paths per layer and width w, separated by ;. In a path a pad name is that pad's centre, name@x,y a point inside that pad or via, vN(x,y) a via of type N, cw(c..) or ccw(c..) an arc to the next point about the centre after c; other vN are vias at no path point)
+3V3: C1.1 C3.1 C12.1 J1.6 L1.2 R1.1 R4.2 R11.1 U1.2 U2.2 U2.39 U2.41 U2.52 | length 33
  Top Layer w0.203: v1(2.535,2.516) C1.1 ; v1(2.567,13.461) U1.2 ; R1.1 4.183,9.813 5.241,10.871 v1(5.64,10.871) ; v1(4.198,3.962) 5.061,3.099 6.804,3.099 7.146,3.441 C3.1 ; R4.2 18.865,37.431 20.245,38.811 v1(20.245,39.319) ; U2.39 31.547,12.492 31.547,11.692 U2.41 32.731,11.692 33.518,10.904 34.816,10.904 v1(35.679,10.041) ; v1(38.202,5.055) 38.202,6.172 38.633,6.604 38.633,7.292 U2.52 ; U2.2 40.931,30.492 41.669,31.231 43.016,31.231 v1(43.879,32.094) ; v1(70.469,46.254) L1.2 ; v1(76.581,41.778) C12.1 ; R11.1 102.183,44.323 103.275,45.415 v1(103.657,45.415)
GND: C1.2 C2.1 C3.2 C4.2 C5.2 C6.2 C7.2 C8.2 C9.2 C10.1 C14.2 J1.5 J2.1 J3.2 R2.1 R3.2 R12.2 SW1.3 SW2.4 TVS1.2 U1.1 U1.40 U1.41 U1.42 U1.43 U1.44 U1.45 U1.46 U1.47 U1.48 U1.49 U2.4 U2.9 U2.15 U2.18 U2.21 U2.26 U2.27 U2.29 U2.34 U2.35 U2.37 U2.40 U2.43 U2.50 U3.1 U3.9 USIM1.C5 USIM1.C8 USIM1.C9 USIM1.C10 USIM1.C11 USIM1.C12 USIM1.C13 USIM1.C14 USIM1.C15 USIM1.C16 USIM1.C17 | length 121.1
  Top Layer w0.203: U1.1 v1(1.297,16.483) ; U1.40 1.297,33.782 1.498,33.983 v1(1.551,33.983) ; SW1.3 v1(3.338,50.317) ; R3.2 5.403,37.431 v1(6.275,38.303) ; C1.2 v1(6.863,5.866) ; v1(5.925,4.191) 6.478,4.191 7.228,4.941 C3.2 ; v1(6.411,22.222) U1.49 ; v1(7.617,19.616) U1.42 ; U1.48 v1(7.617,24.828) ; U1.43 U1.44 ; U1.41 U1.45 10.439,22.2 10.439,20.844 U1.44 ; U1.47 U1.46 v1(10.417,24.828) ; v1(10.417,19.616) U1.44 ; C2.1 11.815,3.453 12.324,3.962 v1(12.998,3.962) ; R2.1 11.422,9.813 12.48,10.871 v1(12.879,10.871) ; SW2.4 v1(19.268,50.317) ; v1(28.194,17.678) 30.208,19.692 U2.21 ; U2.43 32.598,10.892 33.45,10.041 v1(33.952,10.041) ; U2.37 33.341,13.292 33.952,12.681 v1(33.952,11.768) ; U2.35 v1(33.313,14.092) ; U2.29 33.341,16.492 33.952,15.881 v1(33.952,15.222) ; U2.27 v1(33.313,17.292) ; U2.15 32.569,25.292 32.969,24.892 32.969,23.876 32.817,23.724 32.639,23.724 32.512,23.851 v1(32.512,23.978) ; U2.9 v1(33.313,27.692) ; C6.2 33.047,41.297 34.174,40.17 v1(34.174,39.805) ; C5.2 33.047,44.361 34.174,43.234 v1(34.174,42.869) ; C4.2 33.047,47.647 34.174,46.52 v1(34.174,46.155) ; v1(36.627,44.196) 37.389,44.958 TVS1.2 ; v1(38.202,5.055) 38.202,7.686 38.608,8.092 U2.50 40.833,8.092 40.996,8.255 40.996,11.938 40.842,12.092 U2.40 38.733,12.092 38.506,12.319 38.506,14.351 38.647,14.492 U2.34 ; U2.26 v1(41.513,17.692) ; U2.18 v1(41.513,20.892) ; U2.4 v1(41.513,29.692) ; USIM1.C10 45.862,42.672 46.734,41.8 USIM1.C11 48.438,41.8 48.522,41.885 48.912,41.885 USIM1.C12 v1(48.912,43.267) ; v1(45.862,50.143) USIM1.C9 46.662,51.705 46.812,51.855 USIM1.C5 ; v1(51.95,41.98) USIM1.C13 ; v1(55.831,41.961) 56.75,41.961 56.769,41.98 USIM1.C14 ; USIM1.C15 61.012,44.895 61.623,45.506 v1(62.687,45.506) ; USIM1.C16 61.062,48.125 61.673,48.736 v1(62.687,48.736) ; C7.2 66.894,43.71 68.021,42.583 v1(68.021,42.218) ; v1(82.576,50.597) 83.022,50.597 U3.1@83.987,51.562 ; U3.9 82.677,51.816 82.931,51.562 U3.1@83.987,51.562 ; U3.1 U3.1@83.987,51.562 ; v1(91.361,41.778) C14.2 ; C10.1 v1(97.47,47.141) ; C8.2 100.088,54.904 100.686,54.306 v1(100.686,53.677) ; C9.2 100.365,49.911 100.686,49.59 v1(100.686,48.822) ; R12.2 v1(106.015,46.894)
GSM_DTR: U1.34 U2.31 | length 33.8
  Top Layer w0.203: U1.34 8.917,30.682 12.573,27.026 12.573,21.565 18.085,16.053 29.967,16.053 30.328,15.692 U2.31
GSM_LED_WWAN#: U1.31 U2.42 | length 42.8
  Top Layer w0.203: v1(12.725,30.963) 12.727,30.964 U1.31 ; v1(37.592,21.615) 37.16,21.184 37.16,12.232 38.1,11.292 U2.42
  Bottom Layer w0.203: v1(12.725,30.963) 28.245,30.963 v1(37.592,21.615)
GSM_PERST#: U1.32 U2.22 | length 40.2
  Top Layer w0.203: U1.32 11.457,33.25 12.192,33.985 v1(12.37,33.985) ; U2.22 v1(41.504,19.292)
  Bottom Layer w0.203: v1(12.37,33.985) 13.894,32.461 30.353,32.461 34.188,28.626 34.188,26.607 v1(41.504,19.292)
GSM_RI: U1.35 U2.17 | length 30.7
  Top Layer w0.203: v1(7.647,29.185) U1.35 ; v1(29.794,20.955) 30.131,21.292 U2.17
  Bottom Layer w0.203: v1(7.647,29.185) 21.565,29.185 v1(29.794,20.955)
GSM_W_DISABLE#: U1.33 U2.20 | length 35.6
  Top Layer w0.203: U1.33 10.187,30.964 v1(11.052,30.099) ; v1(38.024,20.117) 38.049,20.092 U2.20
  Bottom Layer w0.203: v1(11.052,30.099) 25.07,30.099 35.052,20.117 v1(38.024,20.117)
GSM_WAKE#: U1.30 U2.1 | length 23.9
  Top Layer w0.203: U1.30 v1(13.997,33.985) ; U2.1 33.319,30.892 v1(33.325,30.886)
  Bottom Layer w0.203: v1(13.997,33.985) 30.226,33.985 v1(33.325,30.886)
MCU_CTS: U1.18 U2.25 | length 20.7
  Top Layer w0.203: U1.18 19.355,20.547 19.355,21.082 19.482,21.082 19.482,20.704 19.612,20.574 21.082,20.574 22.659,22.151 32.782,22.151 33.11,21.823 33.11,18.828 32.573,18.29 31.749,18.29 U2.25
MCU_RTS: U1.17 U2.23 | length 18.6
  Top Layer w0.203: U1.17 19.585,19.277 19.612,19.304 19.839,19.531 20.547,19.531 22.837,21.821 32.646,21.821 32.78,21.687 32.78,19.297 32.573,19.09 31.749,19.09 U2.23
MCU_RXD: U1.11 U2.13 | length 68.7
  Top Layer w0.203: U1.11 13.997,15.265 14.552,15.265 14.552,14.999 14.552,13.261 25.908,1.905 42.553,1.905 42.672,2.024 42.672,22.36 42.553,22.479 36.449,22.479 32.864,26.064 31.579,26.064 U2.13
MCU_TXD: U1.10 U2.11 | length 70.9
  Top Layer w0.203: U1.10 12.727,14.961 13.282,14.961 ; 13.282,14.999 13.282,14.023 25.781,1.524 42.934,1.524 43.053,1.643 43.053,22.741 42.934,22.86 36.703,22.86 32.737,26.826 31.617,26.826 U2.11
NetC2_2: C2.2 R5.1 SW1.2 | length 48
  Top Layer w0.203: R5.1 7.962,9.689 ; SW1.2 7.838,39.33 v1(8.077,39.091) ; v1(8.801,10.528) 7.962,9.689 ; C2.2 10.109,4.953 9.474,5.588 9.474,9.144 8.929,9.689 7.962,9.689
  Bottom Layer w0.203: v1(8.077,39.091) 7.29,39.878 5.715,39.878 0.66,34.823 0.66,18.669 v1(8.801,10.528)
NetC4_1: C4.1 R6.2 R9.2 TVS1.6 USIM1.C7 | length 71.8
  Top Layer w0.203: R6.2 27.432,48.006 C4.1 31.847,49.784 35.428,53.365 46.812,53.365 47.168,53.721 52.197,53.721 52.832,53.086 ; TVS1.6 v1(42.367,45.908) ; v1(51.968,44.822) 51.968,50.362 52.832,51.225 USIM1.C7 52.832,53.086 ; R9.2 66.167,57.404 65.583,57.988 55.194,57.988 55.169,55.423 52.832,53.086
  Bottom Layer w0.203: v1(42.367,45.908) 44.079,44.196 51.342,44.196 v1(51.968,44.822)
NetC5_1: C5.1 R7.2 TVS1.5 USIM1.C3 | length 35
  Top Layer w0.203: R7.2 29.642,44.718 29.643,44.72 C5.1 31.847,43.845 v1(32.156,43.536) ; v1(39.878,44.958) TVS1.5 ; v1(54.102,51.493) USIM1.C3
  Bottom Layer w0.203: v1(32.156,43.536) 33.706,41.986 36.906,41.986 v1(39.878,44.958) 44.196,49.276 46.406,49.276 46.914,49.784 46.914,50.292 47.193,50.571 53.18,50.571 v1(54.102,51.493)
NetC6_1: C6.1 R8.2 TVS1.4 USIM1.C2 | length 47.7
  Top Layer w0.203: R8.2 29.591,41.783 29.718,41.656 C6.1 31.847,41.631 v1(30.48,41.631) ; TVS1.4 42.123,44.008 v1(42.367,43.764) ; v1(51.562,51.486) USIM1.C2
  Bottom Layer w0.203: v1(30.48,41.631) 40.234,41.631 v1(42.367,43.764) 46.761,43.764 48.362,42.164 49.378,42.164 51.029,43.815 54.356,43.815 54.966,44.425 54.966,52.451 54.356,53.061 53.137,53.061 v1(51.562,51.486)
NetC7_1: C7.1 R9.1 TVS1.3 U2.8 USIM1.C1 | length 69.4
  Top Layer w0.203: U2.8 38.735,28.092 38.379,28.448 38.379,44.008 TVS1.3 39.054,44.008 40.172,42.89 42.941,42.89 44.221,44.171 44.221,46.482 47.015,49.276 47.015,50.292 47.65,50.927 48.26,50.927 49.022,51.689 ; USIM1.C1 49.022,51.689 ; R9.1 66.167,46.955 65.694,46.482 C7.1 65.694,41.142 65.024,40.472 55.372,40.472 54.864,40.98 54.864,42.926 53.848,43.942 50.952,43.942 49.403,45.491 49.403,50.622 49.022,51.003 49.022,51.689
NetC10_2: C10.2 R10.1 U3.6 | length 29.5
  Top Layer w0.203: U3.6 78.156,54.102 77.394,54.864 77.394,55.88 78.207,56.693 94.945,56.693 96.114,55.524 96.114,54.473 95.885,54.244 R10.1 95.631,52.248 95.758,52.121 C10.2
NetC11_1: C11.1 U3.7 | length 8.5
  Top Layer w0.203: C11.1 77.343,53.467 77.978,52.832 U3.7
NetC11_2: C11.2 L1.1 U3.8 | length 12.3
  Top Layer w0.203: L1.1 C11.2 75.895,51.967 76.3,51.562 U3.8
NetC12_2: C12.2 C13.1 | length 2.3
  Top Layer w0.203: C12.2 C13.1
NetC13_2: C13.2 C14.1 | length 2.4
  Top Layer w0.203: C13.2 C14.1
NetJ1_1: J1.1 U1.25 | length 30.4
  Top Layer w0.203: J1.1 17.12,52.984 17.12,45.847 21.133,41.834 21.133,30.536 20.033,29.437 U1.25
NetJ1_2: J1.2 U1.19 | length 44.1
  Top Layer w0.203: J1.2 17.882,56.49 22.606,56.49 23.367,55.728 23.367,23.747 21.438,21.817 U1.19
NetJ1_3: J1.3 U1.21 | length 36.3
  Top Layer w0.203: U1.21 21.919,24.357 22.707,25.145 22.707,53.34 20.421,55.626 J1.3
NetJ1_4: J1.4 U1.20 | length 36
  Top Layer w0.203: U1.20 21.421,23.087 23.037,24.704 23.037,54.687 J1.4
NetJ1_7: J1.7 U1.23 | length 37.4
  Top Layer w0.203: U1.23 21.207,26.897 21.742,27.432 v1(21.742,52.756)
  Bottom Layer w0.203: v1(21.742,52.756) 26.848,52.756 J1.7
NetJ1_8: J1.8 U1.22 | length 44.5
  Top Layer w0.203: v1(17.553,25.629) 17.555,25.627 U1.22 ; v1(24.232,23.774) 27.28,26.822 27.28,40.691 26.873,41.097 26.873,50.241 J1.8
  Bottom Layer w0.203: v1(17.553,25.629) 19.407,23.774 v1(24.232,23.774)
NetJ2_2: J2.2 U1.37 | length 24.5
  Top Layer w0.203: U1.37 5.107,35.027 7.163,37.082 7.163,53.924 J2.2
NetJ2_3: J2.3 U1.36 | length 24.4
  Top Layer w0.203: U1.36 6.377,34.925 8.956,37.504 8.956,54.671 J2.3
NetR1_2: R1.2 R5.2 U1.3 | length 8.7
  Top Layer w0.203: R1.2 3.81,12.979 3.837,13.006 3.837,13.716 ; U1.3 3.837,13.716 ; R5.2 7.022,11.139 5.156,13.005 4.548,13.005 3.837,13.716
NetR2_2: R2.2 U1.8 | length 4.3
  Top Layer w0.203: U1.8 10.187,13.41 11.049,12.548 R2.2
NetR3_1: R3.1 U1.38 | length 4
  Top Layer w0.203: U1.38 3.837,35.159 4.445,35.767 R3.1
NetR4_1: R4.1 SW2.1 U1.27 | length 10.6
  Top Layer w0.203: SW2.1 14.768,39.101 17.64,36.229 R4.1 18.415,34.644 17.807,34.036 U1.27
NetR6_1: R6.1 U2.10 | length 34.9
  Top Layer w0.203: R6.1 v1(25.982,49.987) ; U2.10 41.173,27.292 v1(42.697,28.816)
  Bottom Layer w0.203: v1(25.982,49.987) 27.026,48.944 27.026,42.088 40.297,28.816 v1(42.697,28.816)
NetR7_1: R7.1 U2.12 | length 28.1
  Top Layer w0.203: v1(25.552,45.949) 26.019,45.482 R7.1 ; v1(38.033,26.492) U2.12
  Bottom Layer w0.203: v1(25.552,45.949) 25.552,39.497 26.416,38.633 27,38.633 34.292,31.341 34.292,30.233 v1(38.033,26.492)
NetR8_1: R8.1 U2.14 | length 31.8
  Top Layer w0.203: R8.1 26.019,40.326 v1(26.416,39.929) ; U2.14 41.504,25.692 v1(41.897,25.298)
  Bottom Layer w0.203: v1(26.416,39.929) 34.622,31.722 34.622,30.988 37.848,27.762 43.688,27.762 44.272,27.178 44.272,25.883 43.688,25.298 v1(41.897,25.298)
NetR10_2: R10.2 U3.4 | length 10.6
  Top Layer w0.203: U3.4 90.17,55.372 90.566,54.976 R10.2
NetR11_2: R11.2 R12.1 U3.5 | length 41.7
  Top Layer w0.203: v1(78.257,55.372) U3.5 ; v1(97.307,44.323) R11.2 v1(101.234,46.279) ; R12.1 v1(108.966,46.38)
  Bottom Layer w0.203: v1(78.257,55.372) 86.258,55.372 v1(97.307,44.323) ; v1(101.234,46.279) 104.14,46.279 104.521,45.898 108.483,45.898 v1(108.966,46.38)
NetTVS1_1: TVS1.1 U2.44 USIM1.SW | length 62.5
  Top Layer w0.203: TVS1.1 TVS1.1@37.897,45.908 ; U2.44 38.327,10.492 36.271,12.548 36.271,20.676 34.265,22.682 30.531,22.682 30.302,22.911 30.302,35.052 32.842,37.592 35.255,37.592 35.763,38.1 35.763,44.765 36.906,45.908 TVS1.1@37.897,45.908 ; USIM1.SW 41.859,52.88 37.897,48.918 TVS1.1@37.897,45.908
USB_DM: U1.13 U2.36 | length 47.1
  Top Layer w0.203: U1.13 16.537,15.748 16.791,16.002 16.838,16.002 17.092,15.748 17.092,14.999 17.092,14.023 28.829,2.286 42.172,2.286 42.291,2.405 42.291,13.522 42.172,13.641 39.802,13.641 U2.36
USB_DP: U1.14 U2.38 | length 42.5
  Top Layer w0.203: U1.14 17.807,14.961 18.362,14.961 ; 18.362,14.999 18.362,13.282 28.977,2.667 41.791,2.667 41.91,2.786 41.91,12.773 41.791,12.892 U2.38
USIM_VDD: U1.29
Vin: C8.1 C9.1 J3.1 U3.2 U3.3 | length 40.7
  Top Layer w0.203: U3.2 U3.3 89.332,54.102 94.488,48.946 98.552,48.946 99.136,49.53 99.136,56.413 100.076,57.353 101.131,57.353 101.588,56.896 C8.1 101.588,53.987 ; C9.1 101.565,53.964 101.588,53.987 ; J3.1 102.108,53.467 101.588,53.987
pads on no net: SW1.1 SW1.4 SW2.2 SW2.3 U1.4 U1.5 U1.6 U1.7 U1.9 U1.12 U1.15 U1.16 U1.24 U1.26 U1.28 U1.39 U2.3 U2.5 U2.6 U2.7 U2.16 U2.19 U2.24 U2.28 U2.30 U2.32 U2.33 U2.45 U2.46 U2.47 U2.48 U2.49 U2.51 U2.MH1 U2.MH2 U2.MP1 U2.MP2 USIM1. USIM1.C6

## Polygon pours and split planes (outlines as drawn)
GND on GND Plane (split plane): 116.203,0.51 0.51,0.51 0.51,57.91 116.203,57.91
+3V3 on PWR Plane (split plane): 116.203,0.51 0.51,0.51 0.51,57.91 116.203,57.91

## Text inside footprints (layer, text, board x,y; h text height)
SW1: Top Overlay "*" at 8.575,49.124 h1.27 r270; Top 3D Body "*" at 7.051,47.638 h1.27 r270
SW2: Top Overlay "*" at 14.031,40.284 h1.27 r90; Top 3D Body "*" at 15.555,41.77 h1.27 r90
TVS1: Top Overlay "*" at 37.814,46.391 h1.27; Top 3D Body "*" at 38.938,45.136 h1.27
U1: Top Overlay "*" at 1.932,13.27 h1.27 r90; Top 3D Body "*" at 1.932,16.039 h1.27 r90